# Altium PCB Cheater Dice V200.PcbDoc
Units mm, origin at the board's own origin, x right, y up, seen from the top; angles counter-clockwise.
Board outline 50.25 x 31.25 mm, 2 copper layers (Top Layer, Bottom Layer); 33 components, 26 nets, 96 pads, 46 vias.
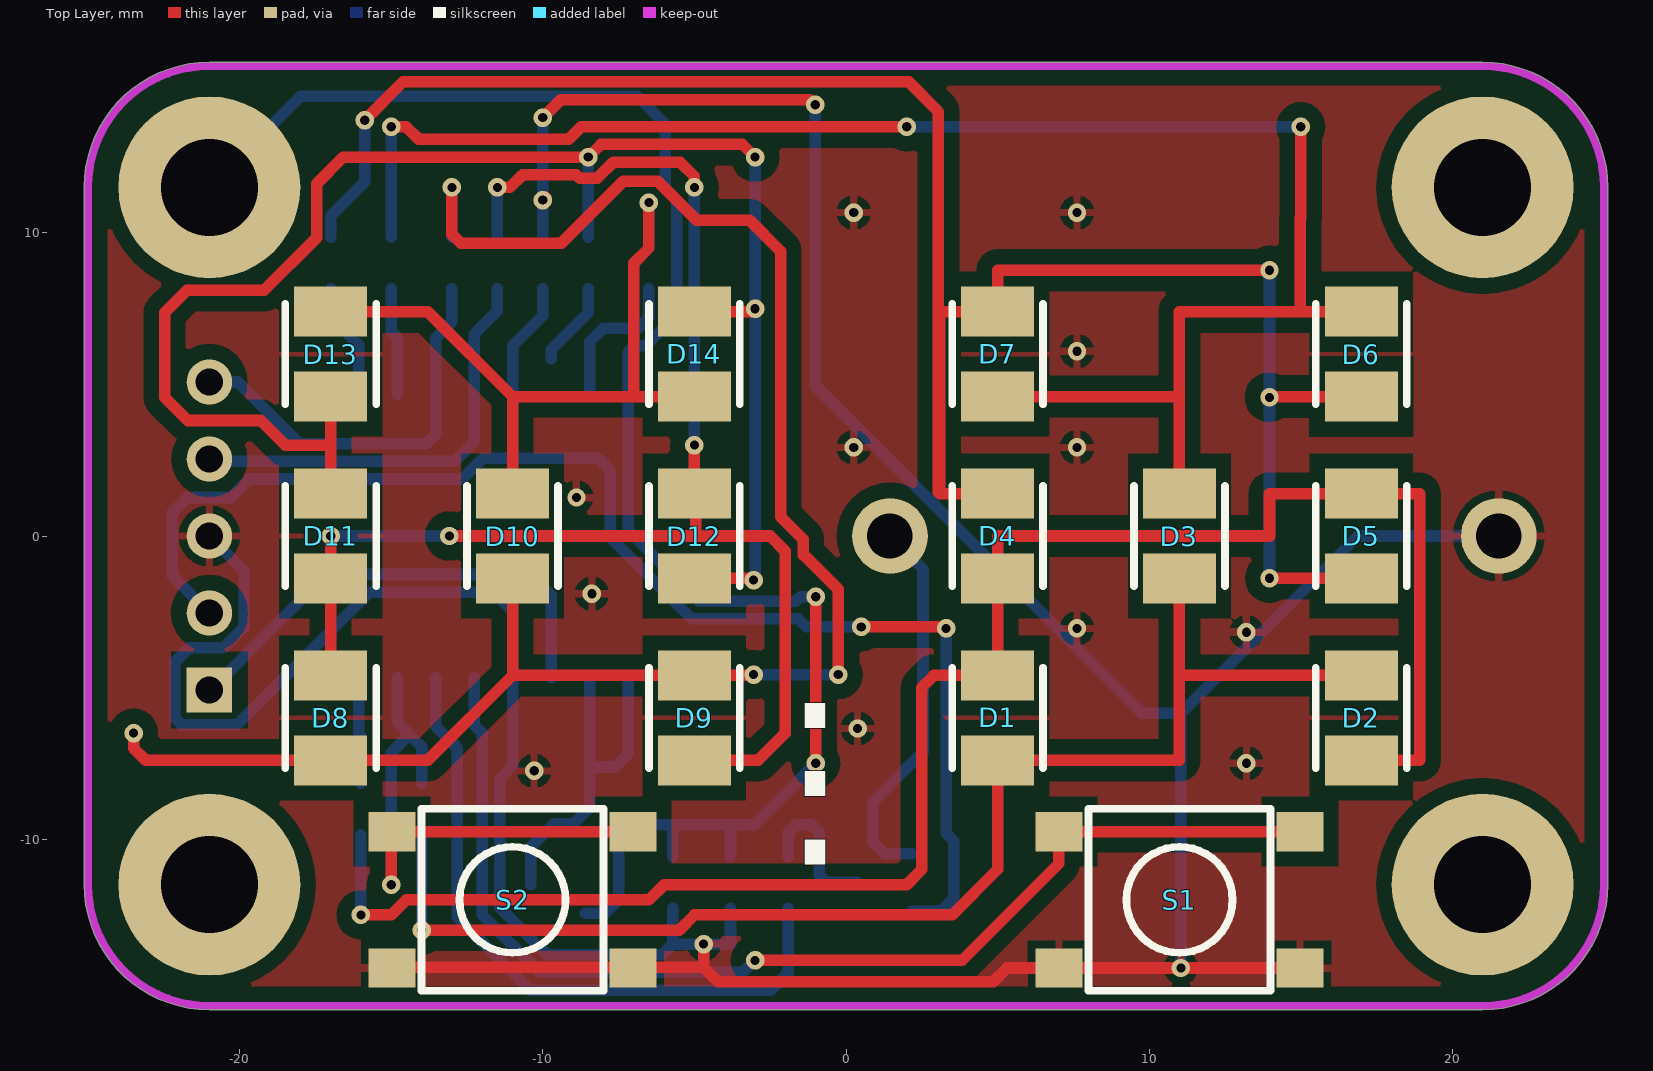
[diagram p0: Top Layer view]
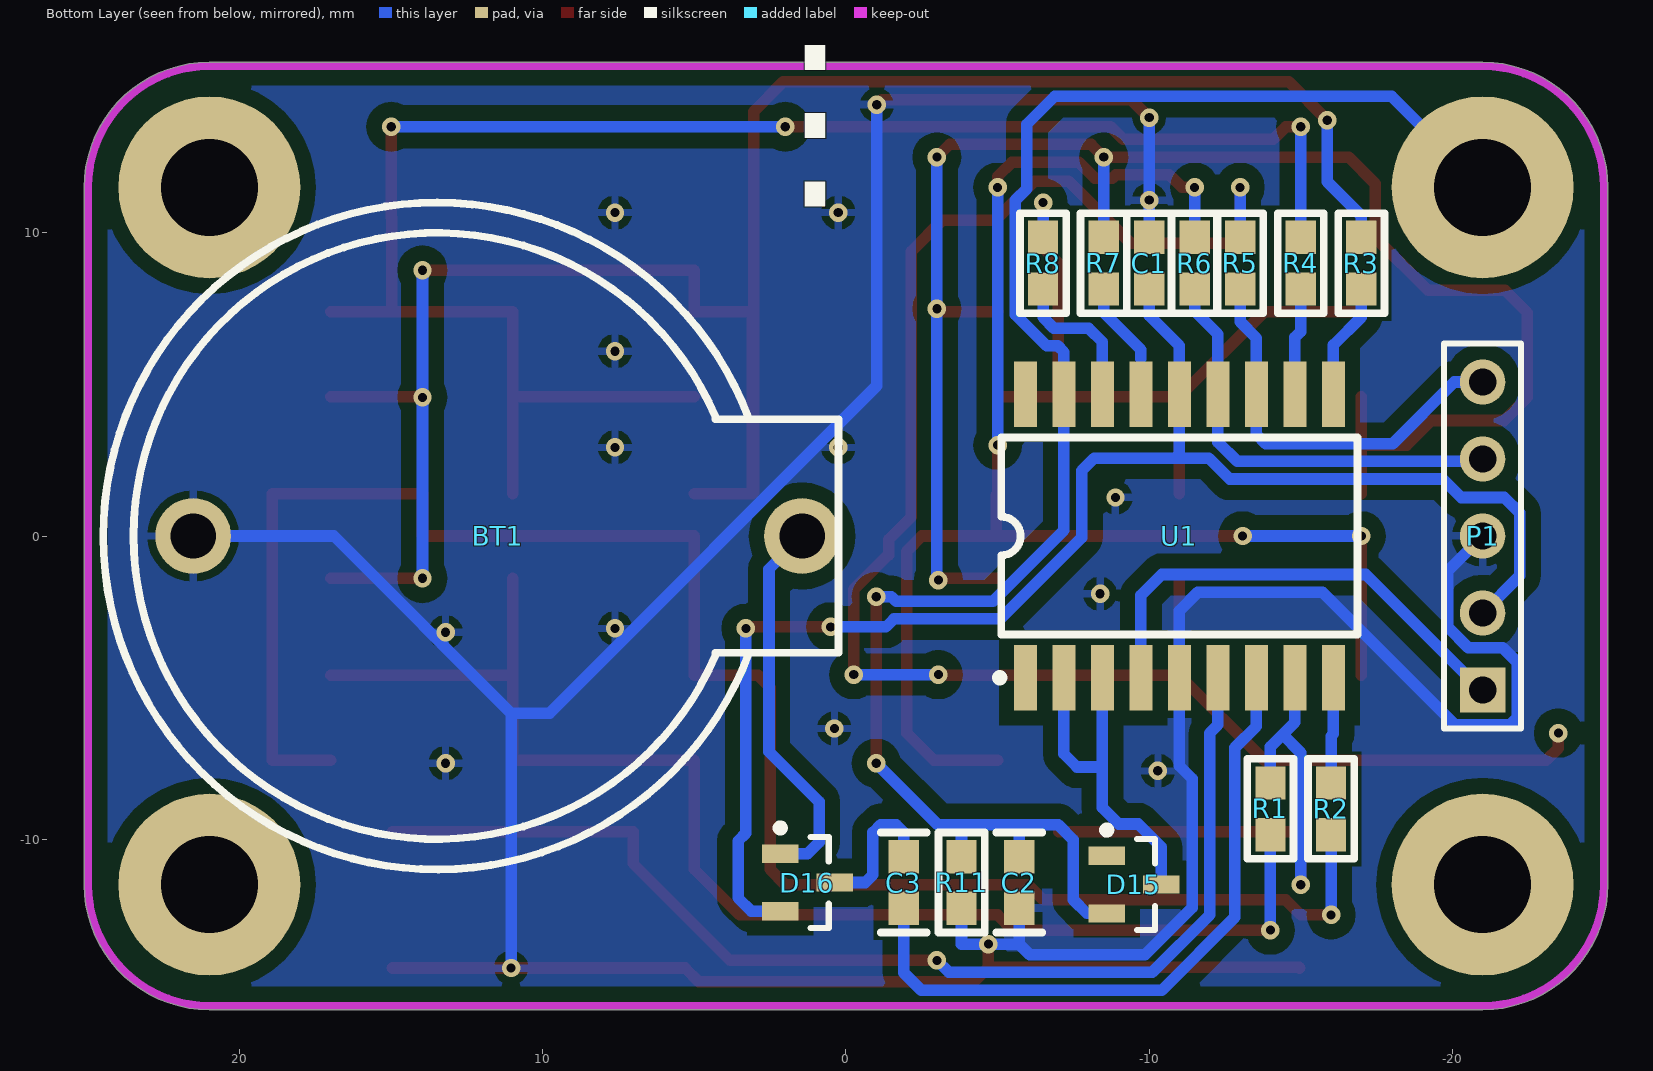
[diagram p1: Bottom Layer view, seen from below]

## Layer stack, top to bottom
Top Layer: signal copper 0.0356
Dielectric: dielectric 0.32, FR-4, Dk 4.8
Bottom Layer: signal copper 0.0356

## Board outline
25.127,11.5 25.127,-11.5 cw(c25,-11.5) 25.127,-11.501 cw(c21,-11.5) 21,-15.627 -21,-15.627 cw(c-21,-11.5) -25.127,-11.5 -25.127,11.5 cw(c-25,11.5) -25.127,11.501 ccw(c-21,11.5) -25.127,11.5 -25.127,11.501 cw(c-21,11.5) -21,15.627 21,15.627 cw(c21,11.5)

## Design rules (kind name [scope] priority, off if disabled: settings)
Clearance Poly_GND [inPolygon vs not innet (gnd)] p1: gap=0.508
Clearance [All] p2: gap=0.203
PasteMaskExpansion [All] p1: expansion=-0.15
PolygonConnect [All] p1: connectstyle=Relief reliefconductorwidth=0.254 reliefentries=4 polygonreliefangle="90 Angle" airgapwidth=0.254
RoutingVias [All] p1: holewidth=0.305 width=0.61 viastyle="Through Hole" minholewidth=0.305 minwidth=0.61 maxholewidth=0.711 maxwidth=1.27
SolderMaskExpansion [All] p1: expansion=0.102
Width Standard [All] p1: maxlimit=0.635 minlimit=0.203 preferedwidth=0.203
Width Power [inNet('VIN')] p2: maxlimit=2.54 minlimit=0.203 preferedwidth=0.635
27 further rules are at their usual default settings.

## Classes and differential pairs
component class U_PIC16F87: C1 C2 C3 D15 D16 P1 R11 S1 S2 U1
component class U_LEDS: D1 D2 D3 D4 D5 D6 D7 D8 D9 D10 D11 D12 D13 D14 R1 R2 R3 R4 R5 R6 R7 R8
component class "Cheater Dice": BT1

## Components (designator, comment, footprint, x,y, rotation, side; value= is the part's Value field where it differs from the comment)
BT1 "Battery" CR2032 13.5,0 r0 bottom
C1 "100nF" "CAP (3D) - 0603" -10,9 r90 bottom
C2 "330pF" "CAP (3D) - 0603" -5.715,-11.43 r90 bottom
C3 "100nF" "CAP (3D) - 0603" -1.905,-11.43 r90 bottom
D1 "LED (RED)" PLCC_2 5,-6 r270 top
D2 "LED (RED)" PLCC_2 17,-6 r270 top
D3 "LED (RED)" PLCC_2 11,0 r270 top
D4 "LED (RED)" PLCC_2 5,0 r270 top
D5 "LED (RED)" PLCC_2 17,0 r270 top
D6 "LED (RED)" PLCC_2 17,6 r270 top
D7 "LED (RED)" PLCC_2 5,6 r270 top
D8 "LED (RED)" PLCC_2 -17,-6 r270 top
D9 "LED (RED)" PLCC_2 -5,-6 r270 top
D10 "LED (RED)" PLCC_2 -11,0 r270 top
D11 "LED (RED)" PLCC_2 -17,0 r270 top
D12 "LED (RED)" PLCC_2 -5,0 r270 top
D13 "LED (RED)" PLCC_2 -17,6 r270 top
D14 "LED (RED)" PLCC_2 -5,6 r270 top
D15 "BAV99" SOT23-3L -9.5,-11.5 r180 bottom
D16 "BAV99" SOT23-3L 1.27,-11.43 r180 bottom
P1 "Header 5" HDR1X5 -21,-5.08 r90 bottom
R1 "470R" "RES (3D) - 0603" -14,-9 r90 bottom
R2 "470R" "RES (3D) - 0603" -16,-9 r90 bottom
R3 "470R" "RES (3D) - 0603" -17,9 r270 bottom
R4 "470R" "RES (3D) - 0603" -15,9 r270 bottom
R5 "470R" "RES (3D) - 0603" -13,9 r270 bottom
R6 "470R" "RES (3D) - 0603" -11.5,9 r270 bottom
R7 "470R" "RES (3D) - 0603" -8.5,9 r270 bottom
R8 "470R" "RES (3D) - 0603" -6.5,9 r270 bottom
R11 "220K" "RES (3D) - 0603" -3.81,-11.43 r270 bottom
S1 "SWITCH" "TACT 6mm" 11,-12 r0 top
S2 "SWITCH" "TACT 6mm" -11,-12 r0 top
U1 "PIC16F648A" SOIC-18 -11,0 r180 bottom

## Footprints (in the part's own frame and the unit in brackets; to place one, negate y for a bottom-side part, rotate by r counter-clockwise, add the part's x,y. Pads: shape width x height; smd on the part's side, far side on the other; paste and mask are expansions set on the pad)
"CAP (3D) - 0603" [mm]
  rect 1.1x1 smd: 1(0.85,0) 2(-0.85,0)
  silkscreen extent -1.65,-0.76 1.65,0.76, body extent -0.8,-0.4 0.8,0.4, height 0.92
CR2032 [mm]
  round 2.5 hole 1.5: 1(-12.05,0) 2(8.035,0)
  silkscreen extent -13.25,-11 11,11
HDR1X5 [mm] "Connector; Header; 5 Position"
  rect 1.5x1.5 hole 0.9: 1(0,0)
  round 1.5 hole 0.9: 2(2.54,0) 3(5.08,0) 4(7.62,0) 5(10.16,0)
  silkscreen extent -1.27,-1.27 11.43,1.27
PLCC_2 [mm]
  rect 1.65x2.41 smd: 1(-1.4,0) 2(1.4,0)
  silkscreen extent -1.65,-1.5 1.65,1.5, body extent -1.85,-1.5 1.85,1.5, height 2.15
"RES (3D) - 0603" [mm]
  rect 1.1x1 smd: 1(0.85,0) 2(-0.85,0)
  silkscreen extent -1.65,-0.76 1.65,0.76, body extent -0.8,-0.4 0.8,0.4, height 0.92
SOIC-18 [mil]
  rect 30x85 smd: 1(-200,-184.05) 2(-150,-184.05) 3(-100,-184.05) 4(-50,-184.05) 5(0,-184.05) 6(50,-184.05) 7(100,-184.05) 8(150,-184.05) 9(200,-184.05) 10(200,184.06) 11(150,184.06) 12(100,184.06) 13(50,184.06) 14(0,184.06) 15(-50,184.06) 16(-100,184.06) 17(-150,184.06) 18(-200,184.06)
  silkscreen extent -238,-189 231,128, body extent -236,-148 236,148, height 100
SOT23-3L [mm] "SOT23, 3-Leads, Body 2.9x1.3mm, Pitch 0.95mm, Lead Span 2.5mm, IPC High Density"
  rect 1.2x0.6 smd: 1(-0.9,0.95) 2(-0.9,-0.95) 3(0.9,0)
  silkscreen extent -1.02,-1.5 0.7,1.92, body extent -1.25,-1.5 1.25,1.5, height 1.12
"TACT 6mm" [mm]
  rect 1.55x1.3 smd: 1(-3.975,-2.25) 1(3.975,-2.25) 2(-3.975,2.25) 2(3.975,2.25)
  silkscreen extent -3,-3 3,3, body extent -3,-3 3,3, height 5

## Part data
BT1: "Multicell Battery"
C1 C2 C3: library part CAP, "CAPACITOR SMD 0402"
D1 D2 D3 D4 D5 D6 D7 D8 D9 D10 D11 D12 D13 D14: library part "LED 3mm RED", "3mm RED LED"
D15 D16: "DUAL DIODE, BAV99"
P1: "Header, 5-Pin"
R1 R2 R3 R4 R5 R6 R7 R8: library part "RES SMD 0603 590R", "RESISTOR SMD 0603 590R"
R11: library part RES, "ZERO OHM LINK"
S1 S2: library part "TACT SWITCH ALPS SKQMAQ", "Switch"
U1: library part PIC16F87/88, "PIC16F88"

## Free pads (board coordinates)
  round 6 hole 3.2: 0(-21,11.5) 0(-21,-11.5) 0(-21,-11.5) 0(21,-11.5) 0(21,11.5)

## Via types
v1: diameter 0.61, hole 0.305, Top Layer to Bottom Layer, 46 vias

## Nets (pads, with @x,y where several pads share a name; then routed paths per layer and width w, separated by ;. In a path a pad name is that pad's centre, name@x,y a point inside that pad or via, vN(x,y) a via of type N, cw(c..) or ccw(c..) an arc to the next point about the centre after c; other vN are vias at no path point)
BUTTON_0: S1.2 U1.6 | length 38.2
  Top Layer w0.381: v1(-3,-14) 3.826,-14 7.025,-10.801 7.025,-9.75 S1.2@14.975,-9.75
  Bottom Layer w0.381: U1.6 -12.27,-6.23 -12,-6.5 -12,-12.5 -10.105,-14.395 -3.395,-14.395 v1(-3,-14)
COMP_OSC_OUT: D15.3 U1.2 U1.3 | length 12
  Bottom Layer w0.381: D15.3 -10.4,-10.259 -9.641,-9.5 -9,-9.5 -8.46,-8.96 -8.46,-7.62 ; U1.3 -8.46,-7.62 ; U1.2 -7.19,-7.19 -7.62,-7.62 -8.46,-7.62
GND: BT1.2 C1.1 C2.2 P1.3 R11.1 S1.1 S2.1 U1.5 | length 133.7
  Top Layer w0.381: S2.1@-14.975,-14.25 -14.949,-14.224 -4.699,-14.224 ; v1(-10,11.082) v1@-9.906,11.176 ; v1(-10,13.802) -9.406,14.395 -1.187,14.395 v1(-1.016,14.224) ; v1(-4.699,-13.462) -4.699,-14.224 ; S1.1@14.975,-14.25 v1(11.049,-14.25) 7.025,-14.25 5.308,-14.25 4.86,-14.698 -4.225,-14.698 -4.699,-14.224
  Bottom Layer w0.381: P1.3 -19.856,-1.144 -19.856,-3.014 -20.526,-3.684 -21.66,-3.684 -22.144,-4.167 -22.144,-5.993 -21.913,-6.224 -20.087,-6.224 -15.717,-1.854 -11.608,-1.854 -11,-2.462 U1.5 -11,-7.585 -11.416,-8.001 -11.416,-12.258 -9.863,-13.811 -6.064,-13.811 -5.715,-13.462 ; C1.1 v1(-10,11.082) v1(-10,13.802) ; C2.2 -5.715,-13.462 ; R11.1 -3.81,-13.462 v1(-4.699,-13.462) -5.715,-13.462 ; v1(-1.016,14.224) -1.016,4.953 9.779,-5.842 11.049,-5.842 ; v1(11.049,-14.25) 11.049,-5.842 ; BT1.2 16.891,0 11.049,-5.842
  other v1: -10.287,-7.747 13.208,-7.493 0.381,-6.35 13.208,-3.175 7.62,-3.048 -8.382,-1.905 -8.89,1.27 0.254,2.921 7.62,2.921 7.62,6.096 0.254,10.668 7.62,10.668
ICSP_VPP: P1.1 U1.4 | length 15.9
  Bottom Layer w0.381: P1.1 -20.955,-5.08 -17.145,-1.27 -10.414,-1.27 -9.73,-1.954 U1.4
LED_0: R1.1 S2.2 U1.8 | length 18.7
  Top Layer w0.381: v1(-15,-11.5) S2.2@-15,-9.775 ; S2.2@-14.975,-9.75 S2.2@-7.025,-9.75
  Bottom Layer w0.381: v1(-15,-11.5) -15,-7.145 -14.405,-6.55 ; U1.8 -14.81,-6.145 -14.405,-6.55 ; R1.1 -14,-6.955 -14.405,-6.55
LED_1: R2.1 U1.9 | length 3.5
  Bottom Layer w0.381: U1.9 -16.08,-6.526 -16,-6.606 R2.1
LED_2: R3.1 U1.10 | length 3.9
  Bottom Layer w0.381: R3.1 -17,7.221 -16.08,6.301 U1.10
LED_3: R4.1 U1.11 | length 3.6
  Bottom Layer w0.381: R4.1 -15,6.745 -14.81,6.555 U1.11
LED_4: P1.5 R5.1 U1.12 | length 13.4
  Bottom Layer w0.381: P1.5 -20.066,5.08 -18.034,3.048 -13.843,3.048 -13.54,3.351 U1.12 -13.54,6.526 -13,7.066 R5.1
LED_5: P1.4 R6.1 U1.13 | length 14.4
  Bottom Layer w0.381: P1.4 -20.924,2.464 -12.903,2.464 -12.27,3.097 U1.13 -12.27,6.653 -11.5,7.423 R6.1
NetC3_1: C3.1 D16.3 | length 4.8
  Bottom Layer w0.381: C3.1 -1.905,-9.779 -1.651,-9.525 -1.143,-9.525 -0.889,-9.779 -0.889,-11.176 -0.635,-11.43 D16.3
NetD1_1: D1.1 D2.2 D4.2 D5.1 R2.2 | length 61.1
  Top Layer w0.381: v1(-16,-12.5) -15,-12.5 -14.5,-12 -6.5,-12 -6,-11.5 2,-11.5 2.5,-11 2.5,-5 2.9,-4.6 D1.1 D4.2 5,0 13.97,0 13.97,1.4 D5.1 17,1.397 18.923,1.397 18.923,-7.4 D2.2
  Bottom Layer w0.381: v1(-16,-12.5) R2.2
NetD1_2: D1.2 D2.1 D3.2 R1.2 | length 44.6
  Top Layer w0.381: v1(-14,-13) -5.5,-13 -5,-12.5 3.5,-12.5 5,-11 D1.2 11,-7.4 11,-4.6 ; D3.2 11,-4.6 ; D2.1 11,-4.6
  Bottom Layer w0.381: v1(-14,-13) R1.2
NetD3_1: D3.1 D6.1 D7.2 R4.2 | length 58.1
  Top Layer w0.381: v1(-15,13.5) -14.513,13.5 -14.097,13.084 -9.144,13.084 -8.728,13.5 v1(2,13.5) ; D7.2 11,4.6 ; D3.1 11,4.6 ; v1(15,13.5) 15,10.514 14.986,10.5 14.986,7.4 ; D6.1 14.986,7.4 ; 11,4.6 11,7.4 14.986,7.4
  Bottom Layer w0.381: R4.2 v1(-15,13.5) ; v1(2,13.5) v1(15,13.5)
NetD4_1: D4.1 D5.2 D6.2 D7.1 R3.2 | length 73.2
  Top Layer w0.381: v1(-15.875,13.716) -14.612,14.979 2.069,14.979 3.048,14 3.048,1.446 3.094,1.4 ; D4.1 3.094,1.4 ; v1(13.97,-1.397) 13.97,-1.4 D5.2 ; v1(13.97,4.572) 13.97,4.6 D6.2 ; v1(13.97,8.763) 5,8.763 D7.1 3.094,7.4 3.094,1.4
  Bottom Layer w0.381: R3.2 -17,10.559 -15.875,11.684 v1(-15.875,13.716) ; v1(13.97,-1.397) v1(13.97,4.572) v1(13.97,8.763)
NetD8_1: D8.1 D9.2 D11.2 D12.1 R6.2 | length 49.8
  Top Layer w0.381: D8.1 D11.2 v1(-17,0) ; v1(-13.081,0) -4.953,0 ; v1(-11.5,11.5) -11.084,11.5 -10.668,11.916 -8.904,11.916 -8.789,11.802 -8.211,11.802 -7.681,12.332 -5.474,12.332 -5,11.858 v1(-5,11.5) ; D9.2 -2.9,-7.4 -2,-6.5 -2,-0.5 -2.5,0 -4.953,0 ; v1(-5,3) D12.1 -4.953,1.353 -4.953,0
  Bottom Layer w0.381: v1(-17,0) v1(-13.081,0) ; R6.2 v1(-11.5,11.5) ; v1(-5,3) v1(-5,11.5)
NetD8_2: D8.2 D9.1 D10.2 R5.2 | length 59
  Top Layer w0.381: v1(-23.5,-6.5) -23.5,-7 -23.1,-7.4 D8.2 -13.8,-7.4 -11,-4.6 ; v1(-13,11.5) -13,9.952 -12.7,9.652 -9.398,9.652 -7.351,11.699 -6.211,11.699 -4.926,10.414 -3.175,10.414 -2.159,9.398 -2.159,0.635 -1.416,-0.108 -1.416,-0.635 -1.377,-0.635 -0.254,-1.758 v1(-0.254,-4.572) ; D10.2 -11,-4.6 ; v1(-3.048,-4.572) -3.076,-4.6 D9.1 -11,-4.6
  Bottom Layer w0.381: R5.2 v1(-13,11.5) ; v1(-3.048,-4.572) v1(-0.254,-4.572)
NetD10_1: D10.1 D13.1 D14.2 R8.2 | length 24.1
  Top Layer w0.381: D13.1 -13.8,7.4 -11,4.6 ; D10.1 -11,4.6 ; v1(-6.5,11) -6.5,9.5 -7,9 -7,4.6 ; D14.2 -7,4.6 ; -11,4.6 -7,4.6
  Bottom Layer w0.381: R8.2 v1(-6.5,11)
NetD11_1: D11.1 D12.2 D13.2 D14.1 R7.2 | length 55.8
  Top Layer w0.381: D11.1 -17,3 ; D13.2 -17,3 ; D12.2 -5,-1.397 -3.048,-1.397 v1(-3.048,-1.452) ; D14.1 v1@-3.048,7.4 ; v1(-3,12.5) -3.416,12.916 -8.084,12.916 v1(-8.5,12.5) -16.583,12.5 -17.462,11.62 -17.462,9.842 -19.199,8.106 -21.739,8.106 -22.479,7.366 -22.479,4.572 -21.717,3.81 -19.31,3.81 -18.5,3 -17,3
  Bottom Layer w0.381: R7.2 v1(-8.5,12.5) ; v1(-3.048,-1.452) -3,-1.5 v1(-3,7.5) v1(-3,12.5)
NetR7_1: R7.1 U1.15 | length 2.8
  Bottom Layer w0.381: -9.73,5.842 -9.73,6.145 -8.5,7.375 R7.1
NetR8_1: R8.1 U1.16 | length 5
  Bottom Layer w0.381: U1.16 -8.46,6.399 -8.001,6.858 -6.858,6.858 -6.5,7.216 R8.1
PUMP: C3.2 U1.7 | length 22.5
  Bottom Layer w0.381: U1.7 -13.54,-6.272 -12.827,-6.985 -12.827,-12.573 -10.421,-14.979 -2.479,-14.979 -1.905,-14.405 C3.2
TOUCH: C2.1 D15.2 pad.0@-21,11.5 R11.2 U1.17 | length 56.5
  Top Layer w0.381: v1(-1,-7.5) v1(-1,-2)
  Bottom Layer w0.381: pad.0@-21,11.5 -18,14.5 -6.88,14.5 -5.969,13.589 -5.969,11.457 -5.584,11.072 -5.584,7.306 -6.616,6.274 -6.985,6.274 -7.19,6.069 U1.17 -7.19,0.19 -4.85,-2.15 -1.65,-2.15 -1.5,-2 v1(-1,-2) ; D15.2 -7.95,-12.45 -7.5,-12 -7.5,-10.025 -7,-9.525 -5.715,-9.525 ; C2.1 -5.715,-9.525 ; R11.2 -3.81,-9.715 ; v1(-1,-7.5) -3.025,-9.525 -5.715,-9.525
VBATT: BT1.1 D16.1 | length 12.7
  Bottom Layer w0.381: BT1.1 2.54,-1.09 2.54,-7.112 0.889,-8.763 0.889,-10.099 1.27,-10.48 D16.1
VCC: C1.2 D16.2 P1.2 U1.14 | length 50.4
  Top Layer w0.381: v1(0.5,-3) 3.35,-3 v1(3.302,-3.048)
  Bottom Layer w0.381: P1.2 -22.225,-1.315 -22.225,0.762 -21.717,1.27 -20.295,1.27 -19.685,1.88 -12.661,1.88 -11.969,2.571 -10.855,2.571 ; C1.2 -10,7.272 -11,6.272 U1.14 -11,2.716 -10.855,2.571 ; v1(0.5,-3) -1.318,-3 -1.583,-2.735 -5.091,-2.735 -7.774,-0.052 -7.774,2.159 -8.187,2.571 -10.855,2.571 ; D16.2 3.12,-12.38 3.56,-11.94 3.56,-10.06 3.302,-9.802 v1(3.302,-3.048)
VCOMP: U1.1
pads on no net: D15.1 U1.18

## Polygon pours and split planes (outlines as drawn)
GND on Bottom Layer "GND" (solid, remove dead copper, pour order 4): 25.127,11.5 25.127,-11.5 cw(c25,-11.5) 25.127,-11.501 cw(c21,-11.5) 21,-15.627 -21,-15.627 cw(c-21,-11.5) -25.127,-11.5 -25.127,11.5 cw(c-25,11.5) -25.127,11.501 ccw(c-20.996,11.5) -25.127,11.5 -25.127,11.501 cw(c-21,11.5) -21,15.627 21,15.627 cw(c21,11.5)
GND on Top Layer "GND" (solid, remove dead copper, pour order 5): 25.127,11.5 25.127,-11.5 cw(c25,-11.5) 25.127,-11.501 cw(c21,-11.5) 21,-15.627 -21,-15.627 cw(c-21,-11.5) -25.127,-11.5 -25.127,11.5 cw(c-25,11.5) -25.127,11.501 ccw(c-20.996,11.5) -25.127,11.5 -25.127,11.501 cw(c-21,11.5) -21,15.627 21,15.627 cw(c21,11.5)

## Keep-outs
Keep-Out Layer:
  lines w0.254: -25,11.5 cw(c-21,11.5) -21,15.5 21,15.5 cw(c21,11.5) 25,11.5 25,-11.5 ; -25,11.5 -25,11.5 ; -25,11.5 -25,-11.5 ccw(c-21,-11.5) -21,-15.5 21,-15.5 ccw(c21,-11.5) 25,-11.5 ; 25,-11.5 25,-11.5

## Silkscreen, mask and mechanical layers (free items; w line width, h text height)
Top Overlay:
  text "⋮" at -4.318,-11.938 h8.89
Bottom Overlay:
  text "⋮" at 4.318,9.779 h8.89
Mechanical 1:
  lines w0.254: -25,11.5 cw(c-21,11.5) -21,15.5 21,15.5 cw(c21,11.5) 25,11.5 25,-11.5 ; -25,11.5 -25,11.5 ; -25,11.5 -25,-11.5 ccw(c-21,-11.5) -21,-15.5 21,-15.5 ccw(c21,-11.5) 25,-11.5 ; 25,-11.5 25,-11.5
Mechanical 4:
  lines w0.254: -35,-25.5 -35,-15.5 -35,15.5 -35,25.5 35,25.5 35,-25.5 -25,-25.5 -35,-25.5